# Altium PCB ALTERA256.PcbDoc (part 2 of 4)
Units mil, origin at the board's own origin, x right, y up, seen from the top; angles counter-clockwise.
Board outline 3078.86 x 1897.76 mil, 4 copper layers (TOP, L2_G, L3_P, BOTTOM), stack 34.7 mil thick; 112 components, 168 nets, 693 pads, 318 vias.
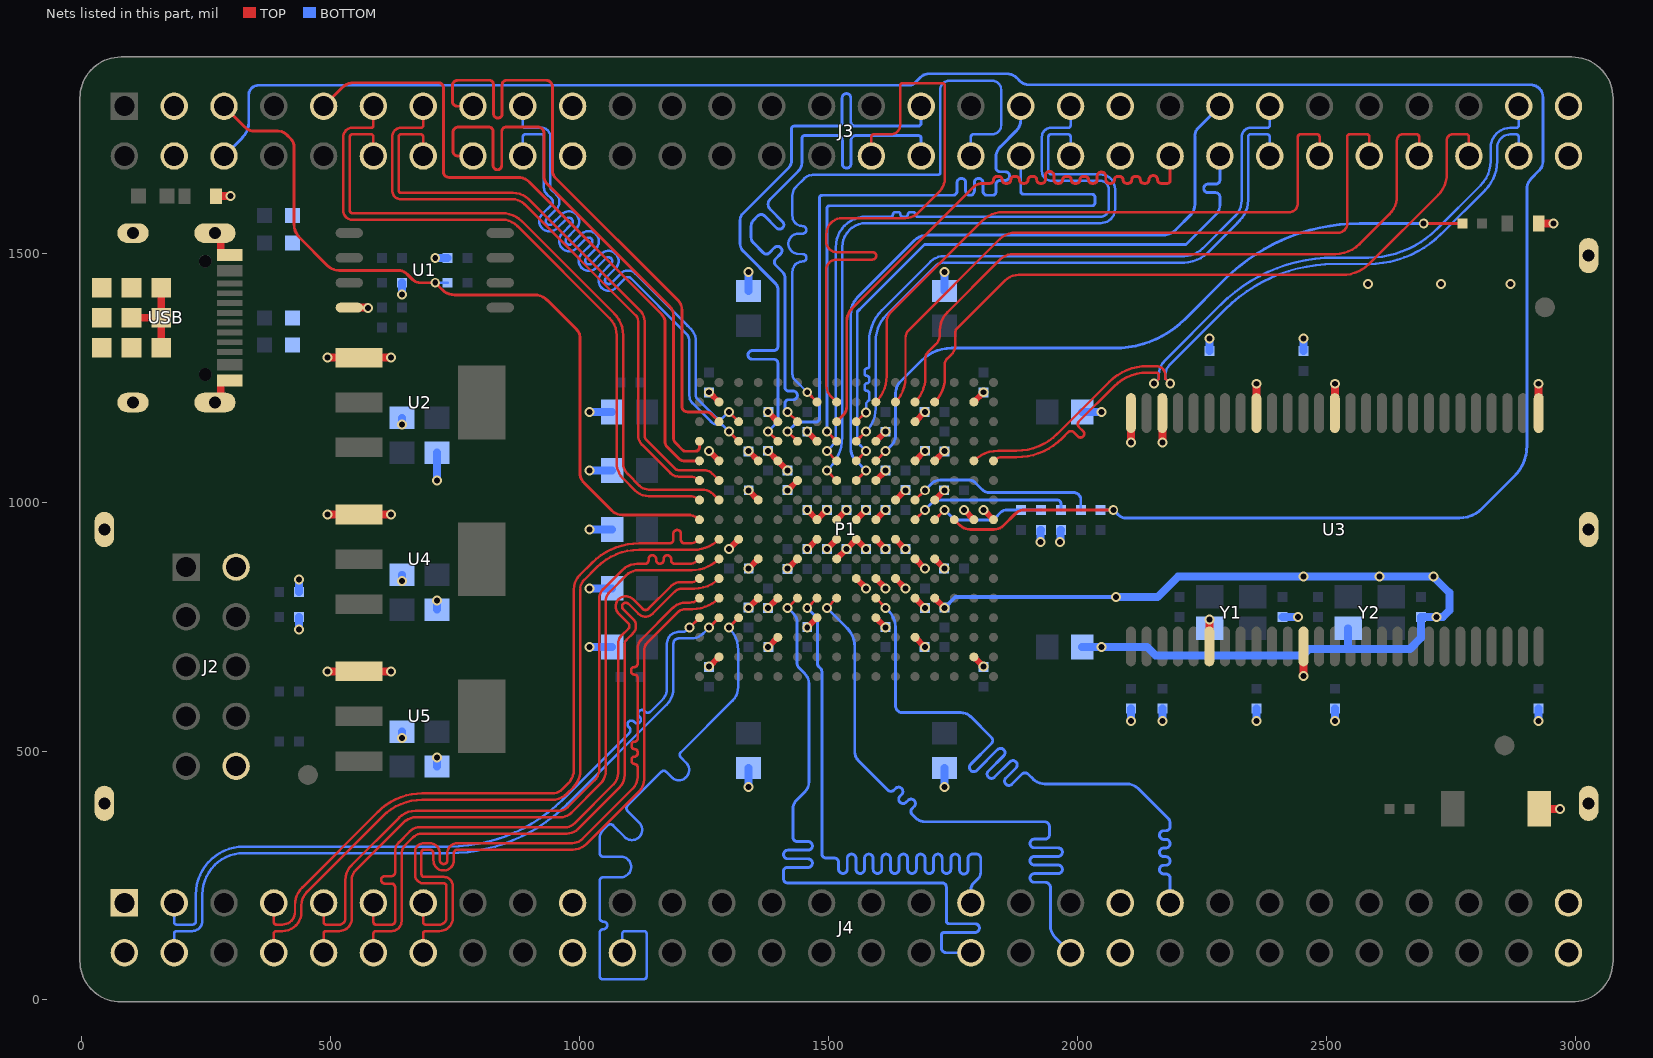
[diagram p4: the nets of this part, all layers, seen from the top]

## Via types
v1: diameter 20, hole 12, TOP to BOTTOM, 314 vias
v2: diameter 20, hole 12, TOP to BOTTOM, tented both sides, 4 vias

## Nets (pads, with @x,y where several pads share a name; then routed paths per layer and width w, separated by ;. In a path a pad name is that pad's centre, name@x,y a point inside that pad or via, vN(x,y) a via of type N, cw(c..) or ccw(c..) an arc to the next point about the centre after c; other vN are vias at no path point) (continued)
B7_T9P_B8: J3.36 P1.B7 | length 1327.8
  TOP w5.78: v1(1457,1220.46) P1.B7@1476.68,1200.78
  BOTTOM w5: v1(1457,1220.46) 1432.02,1245.44 cw(c1443.43,1256.84) 1427.3,1256.84 1427.3,1462.59 cw(c1447.8,1462.59) 1447.8,1483.09 ccw(c1447.8,1490.2) 1454.91,1490.2 1454.91,1490.98 ccw(c1447.8,1490.98) 1447.8,1498.09 1439.55,1498.09 cw(c1439.55,1518.59) 1439.55,1539.09 1447.8,1539.09 ccw(c1447.8,1546.2) 1454.91,1546.2 1454.91,1546.98 ccw(c1447.8,1546.98) 1447.8,1554.09 cw(c1447.8,1574.59) 1427.3,1574.59 1427.3,1615.78 cw(c1451.95,1615.78) 1434.52,1633.21 1451.1,1649.78 cw(c1468.51,1632.4) 1468.49,1657 1719.3,1657 ccw(c1719.3,1662) 1724.3,1662 1724.3,1828.17 cw(c1742.3,1828.17) 1742.3,1846.17 1828.3,1846.17 cw(c1828.3,1828.17) 1846.3,1828.17 1846.3,1756.38 cw(c1828.3,1756.38) 1828.3,1738.38 1790.73,1738.38 ccw(c1790.73,1733.38) 1785.73,1733.38 J3.36@1785.73,1694.88
B8_T11P_CLK4P_B8: J3.32 P1.B8 | length 1286.7
  TOP w5: P1.B8@1516.05,1200.78 1504.06,1212.77 cw(c1525.21,1233.92) 1495.3,1233.92 1495.3,1466.49 cw(c1515.8,1466.49) 1515.8,1486.99 1587.92,1486.99 ccw(c1587.92,1494.49) 1587.92,1501.99 1515.8,1501.99 cw(c1515.8,1522.49) 1495.3,1522.49 1495.3,1538 cw(c1527.3,1538) 1527.3,1570 1653.94,1570 ccw(c1653.93,1606.15) 1679.49,1580.59 1722.4,1623.48 ccw(c1696.15,1649.77) 1733.3,1649.77 1733.3,1836 ccw(c1728.3,1836) 1728.3,1841 1648.3,1841 ccw(c1648.3,1836) 1643.3,1836 1643.3,1756.38 cw(c1625.3,1756.38) 1625.3,1738.38 1590.73,1738.38 ccw(c1590.73,1733.38) 1585.73,1733.38 J3.32@1585.73,1694.88
B10_T16P_B7: J3.50 P1.B10 | length 1317.8
  TOP w5: P1.B10@1594.8,1200.78 ccw(c1542.89,1252.69) 1616.3,1252.69 1616.3,1361 cw(c1644.33,1361) 1624.51,1380.82 1808.29,1564.6 cw(c1850.3,1522.59) 1850.3,1582 2424.3,1582 ccw(c2424.3,1600) 2442.3,1600 2442.3,1733.38 cw(c2447.3,1733.38) 2447.3,1738.38 2480.73,1738.38 cw(c2480.73,1733.38) 2485.73,1733.38 J3.50@2485.73,1694.88
B11_T20P_B7: J3.52 P1.B11 | length 1384.5
  TOP w5: P1.B11@1634.17,1200.78 ccw(c1585.57,1249.38) 1654.3,1249.38 1654.3,1329.99 cw(c1675.09,1329.99) 1660.4,1344.7 1660.5,1344.8 ; 1660.49,1344.8 1843.53,1527.84 cw(c1875.3,1496.07) 1875.3,1541 2523.3,1541 ccw(c2523.3,1559) 2541.3,1559 2541.3,1733.38 cw(c2546.3,1733.38) 2546.3,1738.38 2580.73,1738.38 cw(c2580.73,1733.38) 2585.73,1733.38 J3.52@2585.73,1694.88
B12_T21P_B7: J3.54 P1.B12 | length 1410.1
  TOP w5: P1.B12@1673.54,1200.78 ccw(c1623.42,1250.9) 1694.3,1250.9 1694.3,1289 cw(c1711.2,1289) 1699.25,1300.95 1715.3,1317 ccw(c1695.99,1336.31) 1723.3,1336.31 1723.3,1345 cw(c1774,1345) 1738.15,1380.85 1836.3,1479 1843.98,1486.69 cw(c1871.29,1459.37) 1871.3,1498 2517.3,1498 ccw(c2517.31,1567.98) 2566.09,1517.8 2626.36,1578.07 ccw(c2588.22,1614.99) 2641.3,1615 2641.3,1727 cw(c2652.68,1727) 2652.68,1738.38 2680.73,1738.38 cw(c2680.73,1733.38) 2685.73,1733.38 J3.54@2685.73,1694.88
B13_T22P_B7: J3.56 P1.B13 | length 1440.1
  TOP w5: P1.B13@1712.91,1200.78 ccw(c1663.68,1250.01) 1733.3,1250.01 1733.3,1277 cw(c1747.79,1277.01) 1737.54,1287.25 1745.8,1295.5 ccw(c1725.28,1316.02) 1754.3,1316.02 1754.3,1340 cw(c1766.37,1339.99) 1757.84,1348.53 1853.99,1444.69 cw(c1881.3,1417.37) 1881.3,1456 2531.3,1456 ccw(c2531.31,1533.22) 2585.17,1477.88 2724.28,1616.99 ccw(c2680.98,1658.99) 2741.3,1659 2741.3,1726.38 cw(c2753.3,1726.38) 2753.3,1738.38 2780.73,1738.38 cw(c2780.73,1733.38) 2785.73,1733.38 J3.56@2785.73,1694.88
C2_IO_B1: J3.15 P1.C2 | length 1266
  TOP w5.78: J3.15@785.73,1794.88 754.42,1794.88 cw(c754.42,1805) 744.3,1805 744.3,1836 cw(c755.3,1836) 755.3,1847 818.3,1847 cw(c818.3,1838.33) 826.97,1838.33 826.97,1779.59 ccw(c835.64,1779.59) 844.31,1779.59 844.31,1838.33 cw(c852.98,1838.33) 852.98,1847 932.3,1847 cw(c932.3,1834) 945.3,1834 945.3,1665.49 ccw(c965.79,1665.49) 951.3,1651 1197.8,1404.5 cw(c1179.69,1386.39) 1205.3,1386.39 1205.3,1192 ccw(c1216.21,1192) 1216.21,1181.09 1252.91,1181.09 cw(c1252.91,1163.61) 1265.27,1175.97 P1.C2@1279.83,1161.41
C3_PLL3_CLKOUTN_B8: J3.17 P1.C3 | length 1210.9
  TOP w5.78: v1(1299.52,1181.09) P1.C3@1319.2,1161.41
  BOTTOM w5: J3.17@885.73,1794.88 885.73,1756.38 ccw(c890.73,1756.38) 890.73,1751.38 923.3,1751.38 cw(c923.3,1733.38) 941.3,1733.38 941.3,1631.46 ccw(c946.3,1631.46) 942.76,1627.93 953.3,1617.39 cw(c938.79,1602.9) 953.3,1588.4 934.1,1569.2 ccw(c939.39,1563.9) 934.1,1558.6 ; 934.12,1558.58 ccw(c939.42,1563.87) 944.72,1558.58 963.93,1577.78 cw(c978.42,1563.27) 992.93,1548.78 973.73,1529.57 ccw(c979.02,1524.27) 973.73,1518.97 ; 973.75,1518.95 ccw(c979.05,1524.24) 984.35,1518.95 1003.56,1538.15 cw(c1018.05,1523.64) 1032.56,1509.15 1013.36,1489.94 ccw(c1018.65,1484.64) 1013.36,1479.34 ; 1013.38,1479.32 ccw(c1018.68,1484.61) 1023.98,1479.32 1043.19,1498.52 cw(c1057.68,1484.01) 1072.19,1469.52 1052.99,1450.31 ccw(c1058.28,1445.01) 1052.99,1439.71 ; 1053.01,1439.69 ccw(c1058.31,1444.98) 1063.61,1439.69 1082.82,1458.89 cw(c1097.31,1444.38) 1111.8,1458.89 1216.49,1354.19 ; 1216.5,1354.2 1223.1,1347.6 cw(c1198.49,1322.98) 1233.3,1322.98 1233.3,1213.28 ccw(c1241.19,1213.28) 1235.62,1207.69 1272.64,1170.63 ccw(c1279.24,1177.24) 1279.25,1167.9 1284.26,1167.9 ccw(c1284.26,1172.9) 1287.79,1169.36 v1(1299.52,1181.09)
C6_IO_VREF_B8: J3.34 P1.C6 | length 1218.9
  TOP w5.78: v1(1417.63,1181.09) P1.C6@1437.31,1161.41
  BOTTOM w5.78: 1407.55,1562.73 1382.92,1587.36 cw(c1393.55,1597.99) 1382.92,1608.62 1439.23,1664.93 ccw(c1422.16,1682) 1446.3,1682 1446.3,1730.22 cw(c1452.08,1730.22) 1452.08,1736 1517.77,1736 cw(c1517.77,1726.33) 1527.44,1726.33 1527.44,1679.11 ccw(c1536.11,1679.11) 1544.78,1679.11 1544.78,1726.33 cw(c1554.45,1726.33) 1554.45,1736 1679.95,1736 cw(c1679.95,1730.22) 1685.73,1730.22 J3.34@1685.73,1694.88 ; 1407.56,1562.74 cw(c1401.42,1556.6) 1395.28,1550.46 1370.65,1575.09 ccw(c1364.52,1568.96) 1358.39,1575.09 1349.3,1566 ccw(c1361.37,1553.93) 1344.3,1553.93 1344.3,1531.36 ccw(c1359.66,1531.36) 1348.8,1520.5 1368.8,1500.5 ccw(c1374.93,1506.63) 1381.06,1500.5 1391.43,1510.87 cw(c1397.57,1504.73) 1403.71,1498.59 1393.33,1488.23 ccw(c1399.46,1482.1) 1393.33,1475.97 1407.3,1462 cw(c1395.23,1449.93) 1412.3,1449.93 1412.3,1230.32 ccw(c1419.8,1230.32) 1419.8,1222.82 1428.63,1222.82 cw(c1428.63,1214.15) 1428.63,1205.48 1419.8,1205.48 ccw(c1419.8,1197.98) 1412.3,1197.98 1412.3,1186.42 v1(1417.63,1181.09)
C8_IO_B8: J3.44 P1.C8 | length 1227.8
  TOP w5.78: P1.C8@1516.05,1161.41 1529.47,1174.83 ccw(c1512.98,1191.32) 1536.3,1191.32 1536.3,1362.61 cw(c1573.43,1362.62) 1547.17,1388.87 1790.68,1632.38 cw(c1809.08,1613.98) 1809.08,1640 1824.1,1640 ccw(c1824.1,1647) 1831.1,1647 cw(c1838.1,1647) 1838.1,1654 1841.44,1654 cw(c1841.44,1647) 1848.44,1647 ccw(c1855.44,1647) 1855.44,1640 1858.78,1640 ccw(c1858.78,1647) 1865.78,1647 cw(c1872.78,1647) 1872.78,1654 1876.12,1654 cw(c1876.12,1647) 1883.12,1647 ccw(c1890.12,1647) 1890.12,1640 1893.46,1640 ccw(c1893.46,1647) 1900.46,1647 cw(c1907.46,1647) 1907.46,1654 1910.8,1654 cw(c1910.8,1647) 1917.8,1647 ccw(c1924.8,1647) 1924.8,1640 1928.14,1640 ccw(c1928.14,1647) 1935.14,1647 1935.14,1655.34 cw(c1943.81,1655.34) 1952.48,1655.34 1952.48,1647 ccw(c1959.48,1647) 1959.48,1640 1962.82,1640 ccw(c1962.82,1647) 1969.82,1647 cw(c1976.82,1647) 1976.82,1654 1980.16,1654 cw(c1980.16,1647) 1987.16,1647 ccw(c1994.16,1647) 1994.16,1640 1997.5,1640 ccw(c1997.5,1647) 2004.5,1647 cw(c2011.5,1647) 2011.5,1654 2014.84,1654 cw(c2014.84,1647) 2021.84,1647 ccw(c2028.84,1647) 2028.84,1640 2032.18,1640 ccw(c2032.18,1647) 2039.18,1647 2039.18,1654.02 cw(c2047.84,1654.02) 2047.84,1662.68 cw(c2047.84,1654) 2056.52,1654 2056.52,1647 ccw(c2063.52,1647) 2063.52,1640 2066.86,1640 ccw(c2066.86,1647) 2073.86,1647 cw(c2080.86,1647) 2080.86,1654 2084.2,1654 cw(c2084.2,1647) 2091.2,1647 ccw(c2098.2,1647) 2098.2,1640 2101.54,1640 ccw(c2101.54,1647) 2108.54,1647 cw(c2115.54,1647) 2115.54,1654 2118.88,1654 cw(c2118.88,1647) 2125.88,1647 ccw(c2132.88,1647) 2132.88,1640 2136.22,1640 ccw(c2136.22,1647) 2143.22,1647 cw(c2151.88,1647) 2151.88,1655.66 ; 2151.9,1655.66 cw(c2151.9,1647) 2160.56,1647 ccw(c2167.56,1647) 2167.56,1640 2179.95,1640 ccw(c2179.95,1645.78) 2185.73,1645.78 J3.44@2185.73,1694.88
C9_T15N_B7: J3.47 P1.C9 | length 1316.6
  TOP w5.78: P1.C9@1555.43,1161.41 1555.92,1161.41 1574.51,1180 v1(1575,1180)
  BOTTOM w5: v1(1575,1180) 1575,1198.28 1581.3,1204.58 1581.3,1218.8 ccw(c1576.8,1218.8) 1576.8,1223.3 cw(c1576.8,1227.8) 1572.3,1227.8 1572.3,1233.8 cw(c1576.8,1233.8) 1576.8,1238.3 ccw(c1576.8,1242.8) 1581.3,1242.8 1581.3,1248.8 ccw(c1576.8,1248.8) 1576.8,1253.3 cw(c1576.8,1257.8) 1572.3,1257.8 1572.3,1263.8 cw(c1576.8,1263.8) 1576.8,1268.3 ccw(c1576.8,1272.8) 1581.3,1272.8 1581.3,1323 cw(c1669.15,1323.01) 1607.03,1385.13 1704.48,1482.58 cw(c1732.05,1455.01) 1732.05,1494 2213.7,1494 ccw(c2213.7,1547.6) 2251.6,1509.7 2316.15,1574.25 ccw(c2284.4,1606) 2329.3,1606 2329.3,1733.38 cw(c2347.3,1733.38) 2347.3,1751.38 2380.73,1751.38 ccw(c2380.73,1756.38) 2385.73,1756.38 J3.47@2385.73,1794.88
CONF_DONE: J3.6 P1.H14 R13.1 | length 4767.5
  TOP w5.78: P1.H14@1752.28,964.56 1762.94,953.9 ccw(c1786.65,977.61) 1764.26,952.65 ccw(c1784.23,974.87) 1784.21,945 1831.99,945 ccw(c1831.99,972.31) 1851.3,953 1874.8,976.5 cw(c1893.49,957.81) 1893.49,984.24 v1(2071.54,984.24)
  BOTTOM w5.78: J3.6@285.73,1694.88 322.57,1731.72 ccw(c291.84,1762.45) 335.3,1762.45 335.3,1817 cw(c355.3,1817) 355.3,1837 1661.94,1837 ccw(c1661.94,1852.36) 1672.8,1841.5 1684.3,1853 cw(c1701.2,1836.1) 1701.2,1860 1858.3,1860 cw(c1858.3,1833.44) 1877.08,1852.22 1884.3,1845 ccw(c1901.2,1861.9) 1901.2,1838 2909.3,1838 cw(c2909.3,1813) 2934.3,1813 2934.3,1683.61 cw(c2908.69,1683.61) 2926.8,1665.5 2910.8,1649.5 ccw(c2931.32,1628.98) 2902.3,1628.98 2902.3,1113.52 cw(c2814.13,1113.52) 2876.48,1051.18 2812.15,986.85 cw(c2766.64,1032.36) 2766.64,968 2096.82,968 cw(c2096.83,989.84) 2081.38,974.4 v1(2071.54,984.24) R13.1@2046.3,984.24
D1_IO_B1: J3.16 P1.D1 | length 1236.2
  TOP w5.78: J3.16@785.73,1694.88 755.42,1694.88 cw(c755.42,1705) 745.3,1705 745.3,1742 cw(c756.3,1742) 756.3,1753 817.47,1753 cw(c817.47,1744.33) 826.14,1744.33 826.14,1675.93 ccw(c834.81,1675.93) 843.48,1675.93 843.48,1744.33 cw(c852.15,1744.33) 852.15,1753 916.3,1753 cw(c916.3,1741) 928.3,1741 928.3,1654.9 ccw(c952.2,1654.9) 935.3,1638 1180.8,1392.5 cw(c1162.69,1374.39) 1188.3,1374.39 1188.3,1128.66 ccw(c1201.96,1128.66) 1192.3,1119 1207.6,1103.7 ccw(c1211.7,1107.79) 1211.7,1102 1232.68,1102 ccw(c1232.68,1109.78) 1240.46,1109.78 P1.D1@1240.46,1122.04
D3_PLL3_CLKOUTP_B8: J3.18 P1.D3 | length 1210.9
  TOP w5.78: v1(1299.52,1141.72) P1.D3@1319.2,1122.04
  BOTTOM w5: J3.18@885.73,1694.88 885.73,1733.38 cw(c890.73,1733.38) 890.73,1738.38 923.3,1738.38 cw(c923.3,1733.38) 928.3,1733.38 928.3,1631.46 ccw(c946.31,1631.46) 933.56,1618.74 944.1,1608.19 cw(c938.79,1602.9) 944.1,1597.6 924.9,1578.4 ccw(c939.39,1563.9) 924.9,1549.4 ; 924.92,1549.38 ccw(c939.42,1563.87) 953.92,1549.38 973.12,1568.58 cw(c978.42,1563.27) 983.73,1557.97 964.53,1538.77 ccw(c979.02,1524.27) 964.53,1509.77 ; 964.55,1509.75 ccw(c979.05,1524.24) 993.55,1509.75 1012.75,1528.95 cw(c1018.05,1523.64) 1023.36,1518.34 1004.16,1499.14 ccw(c1018.65,1484.64) 1004.16,1470.14 ; 1004.18,1470.12 ccw(c1018.68,1484.61) 1033.18,1470.12 1052.38,1489.32 cw(c1057.68,1484.01) 1062.99,1478.71 1043.79,1459.51 ccw(c1058.28,1445.01) 1043.79,1430.51 ; 1043.81,1430.49 ccw(c1058.31,1444.98) 1072.81,1430.49 1092.01,1449.69 cw(c1097.31,1444.38) 1102.61,1449.69 1213.9,1338.4 cw(c1198.49,1322.97) 1220.3,1322.98 1220.3,1213.28 ccw(c1241.2,1213.27) 1226.42,1198.49 1263.45,1161.43 ccw(c1279.23,1177.24) 1279.27,1154.9 1284.27,1154.9 cw(c1284.27,1149.9) 1287.8,1153.44 v1(1299.52,1141.72)
D5_IO_B8: J3.33 P1.D5 | length 1235.9
  TOP w5.78: v1(1378.26,1141.72) P1.D5@1397.94,1122.04
  BOTTOM w5.78: v1(1378.26,1141.72) 1391.92,1155.38 1392.47,1155.94 ccw(c1378.41,1170.01) 1398.3,1170 1398.3,1278.07 ccw(c1389.63,1278.07) 1389.63,1286.74 1346.62,1286.74 cw(c1346.62,1295.41) 1346.62,1304.08 1389.63,1304.08 ccw(c1389.63,1312.75) 1398.3,1312.75 1398.3,1426.22 ccw(c1379.52,1426.22) 1392.8,1439.5 1329.8,1502.5 1328.66,1503.63 cw(c1344.03,1518.99) 1322.3,1519 1322.3,1566.22 cw(c1341.08,1566.22) 1327.8,1579.5 1419.3,1671 ccw(c1404.81,1685.49) 1425.3,1685.49 1425.3,1749.22 cw(c1431.08,1749.22) 1431.08,1755 1518.42,1755 ccw(c1518.42,1763.67) 1527.09,1763.67 1527.09,1811.49 cw(c1535.76,1811.49) 1544.43,1811.49 1544.43,1763.67 ccw(c1553.1,1763.67) 1553.1,1755 1679.95,1755 ccw(c1679.95,1760.78) 1685.57,1759.44 ccw(c1679.86,1760.8) 1685.73,1760.8 J3.33@1685.73,1794.88
D6_IO_B8: J3.37 P1.D6 | length 1244.3
  TOP w5.78: v1(1417.63,1141.72) P1.D6@1437.31,1122.04
  BOTTOM w5.78: v1(1417.63,1141.72) 1435.14,1159.28 cw(c1439.25,1155.23) 1439.25,1161 1475.52,1161 ccw(c1475.52,1166.78) 1481.3,1166.78 1481.3,1610.22 cw(c1487.08,1610.22) 1487.08,1616 1749.15,1616 ccw(c1749.15,1624.67) 1757.82,1624.67 1757.82,1641.33 cw(c1766.49,1641.33) 1775.16,1641.33 1775.16,1624.67 ccw(c1783.83,1624.67) 1792.5,1624.67 1792.5,1641.33 cw(c1801.17,1641.33) 1809.84,1641.33 1809.84,1624.67 ccw(c1818.51,1624.67) 1818.51,1616 1829.29,1616 ccw(c1829.29,1622.51) 1835.8,1622.51 1835.8,1637.24 cw(c1844.47,1637.24) 1844.47,1645.91 1854.63,1645.91 ccw(c1854.63,1654.58) 1854.63,1663.25 1844.47,1663.25 cw(c1844.47,1671.92) 1835.8,1671.92 1835.8,1691.77 cw(c1866.53,1691.77) 1844.8,1713.5 1876.8,1745.5 ccw(c1855.24,1767.06) 1885.73,1767.06 J3.37@1885.73,1794.88
D8_IO_B8: J3.38 P1.D8 | length 1258.4
  TOP w5.78: v1(1496.37,1141.72) P1.D8@1516.05,1122.04
  BOTTOM w5.78: v1(1496.37,1141.72) 1496.37,1589.22 cw(c1502.15,1589.22) 1502.15,1595 2028.93,1595 ccw(c2028.93,1600.78) 2034.71,1600.78 2034.71,1612.22 ccw(c2028.93,1612.22) 2028.93,1618 1891.51,1618 cw(c1891.51,1623.78) 1885.73,1623.78 J3.38@1885.73,1694.88
D9_T15P_B7: J3.48 P1.D9 | length 1317
  TOP w5.78: P1.D9@1555.43,1122.04 v1(1575.11,1141.72)
  BOTTOM w5: v1(1575.11,1141.72) ccw(c1528.78,1188.05) 1594.3,1188.05 1594.3,1323 cw(c1669.14,1323) 1616.23,1375.93 1626.79,1386.5 ; 1626.8,1386.5 1713.68,1473.38 cw(c1732.06,1455.02) 1732.05,1481 2213.71,1481 ccw(c2213.7,1547.6) 2260.79,1500.5 2320.79,1560.5 ; 2320.8,1560.5 2325.35,1565.05 ccw(c2284.39,1605.99) 2342.3,1606.01 2342.3,1733.38 cw(c2347.3,1733.38) 2347.3,1738.38 2380.73,1738.38 cw(c2380.73,1733.38) 2385.73,1733.38 J3.48@2385.73,1694.88
DCLK: J3.5 P1.H1 R7.2 | length 1585.1
  TOP w5.78: J3.5@285.73,1794.88 327.95,1752.66 ccw(c346.44,1771.15) 346.44,1745 393.69,1745 cw(c393.69,1719.39) 411.8,1737.5 419.3,1730 cw(c402.4,1713.1) 426.3,1713.1 426.3,1557.56 ccw(c463.86,1557.56) 437.3,1531 493.8,1474.5 ccw(c516.74,1497.44) 516.74,1465 635.69,1465 cw(c635.69,1439.39) 653.8,1457.5 664.8,1446.5 ccw(c679.55,1461.25) 679.55,1440.39 v1(709.95,1440.39) 724.32,1426.02 ccw(c748.51,1450.21) 748.51,1416 909.45,1416 cw(c909.45,1380.15) 934.8,1405.5 994.3,1346 cw(c979.81,1331.51) 1000.3,1331.51 1000.3,1060 ccw(c1031.68,1060) 1009.49,1037.81 1064.3,983 ccw(c1086.03,1004.73) 1086.03,974 1217.67,974 cw(c1217.67,941.77) P1.H1@1240.46,964.56
  BOTTOM w5.78: v1(709.95,1440.39) R7.2@734.95,1440.39
E1_CLK1_B1: J3.9 P1.E1 | length 1335.7
  TOP w5.78: J3.9@485.73,1794.88 523.35,1832.53 cw(c546.15,1809.81) 546.16,1842 716.6,1842 cw(c716.6,1832.3) 726.3,1832.3 726.3,1663 ccw(c737.3,1663) 737.3,1652 875.86,1652 cw(c875.86,1619.56) 898.8,1642.5 1165,1376.3 cw(c1149.79,1361.09) 1171.3,1361.09 1171.3,1120.66 ccw(c1184.96,1120.66) 1175.3,1111 1199.8,1086.5 ccw(c1209.05,1095.75) 1209.05,1082.67 P1.E1@1240.46,1082.67
E8_T10N_B8: J3.39 P1.E8 | length 1428
  TOP w5.78: v1(1496.37,1102.35) P1.E8@1516.05,1082.67
  BOTTOM w5: v1(1496.37,1102.35) 1505.42,1111.4 ccw(c1483.98,1132.84) 1514.3,1132.84 1514.3,1512 cw(c1575.3,1512) 1575.3,1573 1624.66,1573 ccw(c1624.66,1577.5) 1629.16,1577.5 cw(c1633.66,1577.5) 1633.66,1582 1639.66,1582 cw(c1639.66,1577.5) 1644.16,1577.5 ccw(c1648.66,1577.5) 1648.66,1573 1654.66,1573 ccw(c1654.66,1577.5) 1659.16,1577.5 cw(c1663.66,1577.5) 1663.66,1582 1669.66,1582 cw(c1669.66,1577.5) 1674.16,1577.5 ccw(c1678.66,1577.5) 1678.66,1573 2046.3,1573 ccw(c2046.3,1589) 2062.3,1589 2062.3,1628.05 ccw(c2045.35,1628.05) 2045.35,1645 1947.56,1645 cw(c1947.56,1664.26) 1928.3,1664.26 1928.3,1733.38 cw(c1946.3,1733.38) 1946.3,1751.38 1980.73,1751.38 ccw(c1980.73,1756.38) 1985.73,1756.38 J3.39@1985.73,1794.88
E9_IO_B7: J3.46 P1.E9 | length 1285.8
  TOP w5.78: P1.E9@1555.43,1082.67 v1(1575.11,1102.35)
  BOTTOM w5.78: v1(1575.11,1102.35) 1563.74,1113.72 cw(c1574.68,1124.67) 1563.18,1114.31 1557.31,1120.18 1557.31,1382.01 1568.72,1393.42 1681.29,1506 1692.29,1517 2217.29,1517 2277.8,1577.51 ccw(c2258.67,1596.65) 2285.73,1596.65 2285.73,1612.54 ccw(c2277.06,1612.54) 2277.06,1621.21 2261.97,1621.21 cw(c2261.97,1629.88) 2261.97,1638.55 2277.06,1638.55 ccw(c2277.06,1647.22) 2285.73,1647.22 J3.46@2285.73,1694.88
E10_LED0_B7: P1.E10 R2.2 | length 1407.8
  TOP w5.78: P1.E10@1594.8,1082.67 v1(1614.48,1102.35) ; v1(2695.02,1559.28) R2.2@2772.42,1559.28
  BOTTOM w5.78: v1(1614.48,1102.35) 1625.56,1113.43 ccw(c1600.33,1138.65) 1626.41,1114.31 ccw(c1604.97,1134.32) 1634.3,1134.32 1634.3,1218 cw(c1668.1,1218) 1644.2,1241.9 1686.32,1284.02 cw(c1746.62,1223.73) 1746.62,1309 2073.7,1309 ccw(c2073.7,1510.82) 2216.41,1368.11 2295.23,1446.93 cw(c2566.47,1175.69) 2566.47,1559.28 v1(2695.02,1559.28)
E15_CLK_2P_B6: J3.58 P1.E15 | length 1473.8
  TOP w5: P1.E15@1791.65,1082.67 cw(c1840.73,1033.59) 1840.73,1103 1876.99,1103 ccw(c1877,1219.66) 1959.47,1137.15 2063.87,1241.53 cw(c2139.87,1165.5) 2139.88,1273 2157.66,1273 cw(c2157.66,1254.35) 2176.31,1254.35 2176.31,1247.64 v1(2185.95,1238)
  BOTTOM w5: v1(2185.95,1238) 2176.31,1247.64 2176.31,1255.78 cw(c2203.45,1255.77) 2184.27,1274.97 2296.19,1386.89 cw(c2516.14,1166.95) 2516.14,1478 2583.7,1478 ccw(c2583.7,1685.61) 2730.5,1538.8 2818.71,1627.01 ccw(c2761.74,1683.97) 2842.3,1683.98 2842.3,1711.5 cw(c2869.18,1711.5) 2869.18,1738.38 2880.73,1738.38 cw(c2880.73,1733.38) 2885.73,1733.38 J3.58@2885.73,1694.88
E16_CLK_2N_B6: J3.57 P1.E16 | length 1472.6
  TOP w5: P1.E16@1831.02,1082.67 cw(c1848.72,1064.97) 1848.72,1090 1876.98,1090 ccw(c1877.01,1219.66) 1968.67,1127.95 1981.1,1140.37 cw(c1986.4,1135.06) 1991.7,1140.37 2000.38,1131.69 ccw(c2005.68,1137) 2010.99,1142.3 2002.31,1150.98 cw(c2007.62,1156.28) 2002.31,1161.58 2073.07,1232.33 cw(c2139.88,1165.51) 2139.88,1260 2157.66,1260 cw(c2157.66,1254.35) 2163.31,1254.35 2163.31,1247.65 v1(2153.66,1238)
  BOTTOM w5: v1(2153.66,1238) 2163.31,1247.65 2163.31,1255.79 cw(c2203.46,1255.78) 2175.07,1284.17 2286.99,1396.09 cw(c2516.13,1166.95) 2516.14,1491 2583.7,1491 ccw(c2583.69,1685.61) 2721.3,1548 2809.51,1636.21 ccw(c2761.73,1683.97) 2829.29,1683.98 ; 2829.3,1683.97 2829.3,1711.5 cw(c2869.18,1711.5) 2869.18,1751.38 2880.73,1751.38 ccw(c2880.73,1756.38) 2885.73,1756.38 J3.57@2885.73,1794.88
F1_L5N_B1: J3.13 P1.F1 | length 1222.1
  TOP w5: J3.13@685.73,1794.88 685.73,1756.38 cw(c680.73,1756.38) 680.73,1751.38 641.3,1751.38 ccw(c641.3,1733.38) 623.3,1733.38 623.3,1626 ccw(c641.3,1626) 641.3,1608 865.53,1608 cw(c865.52,1574.72) 889.06,1598.24 1112.63,1374.67 cw(c1101.41,1363.42) 1117.3,1363.43 1117.3,1134.11 ccw(c1144.02,1134.1) 1125.12,1115.21 1182.21,1058.07 ccw(c1199.27,1075.13) 1199.28,1051 1222.3,1051 cw(c1222.29,1025.75) 1240.15,1043.6 P1.F1@1240.46,1043.3
F2_L5P_B1: J3.14 P1.F2 | length 1226
  TOP w5: J3.14@685.73,1694.88 685.73,1733.38 ccw(c680.73,1733.38) 680.73,1738.38 641.3,1738.38 ccw(c641.3,1733.38) 636.3,1733.38 636.3,1626 ccw(c641.3,1626) 641.3,1621 865.54,1621 cw(c865.53,1574.72) 898.26,1607.44 1121.83,1383.87 cw(c1101.4,1363.43) 1130.3,1363.43 1130.3,1134.11 ccw(c1144.01,1134.11) 1134.32,1124.41 1191.41,1067.26 ccw(c1199.28,1075.13) 1199.27,1064 1249.12,1064 cw(c1249.12,1039.83) 1266.21,1056.92 P1.F2@1279.83,1043.3
F8_T10P_B8: J3.40 P1.F8 | length 1429.3
  TOP w5.78: v1(1496.37,1062.98) P1.F8@1516.05,1043.3
  BOTTOM w5: v1(1496.37,1062.98) 1501.38,1067.99 ccw(c1438.79,1130.57) 1527.3,1130.57 1527.3,1512 cw(c1575.3,1512) 1575.3,1560 2046.3,1560 ccw(c2046.3,1589) 2075.3,1589 2075.3,1628.05 ccw(c2045.35,1628.05) 2045.35,1658 1947.56,1658 cw(c1947.56,1664.26) 1941.3,1664.26 1941.3,1733.38 cw(c1946.3,1733.38) 1946.3,1738.38 1980.73,1738.38 cw(c1980.73,1733.38) 1985.73,1733.38 J3.40@1985.73,1694.88
F9_IO_B7: J3.45 P1.F9 | length 1365.6
  TOP w5.78: P1.F9@1555.43,1043.3 v1(1575.11,1062.98)
  BOTTOM w5.78: v1(1575.11,1062.98) 1553.69,1084.4 cw(c1576.36,1107.07) 1544.3,1107.07 1544.3,1376.42 cw(c1595.47,1376.42) 1559.48,1412.8 1671.74,1525.06 cw(c1698.15,1498.65) 1698.15,1536 2170.74,1536 ccw(c2170.74,1573.56) 2197.3,1547 2227.3,1577 ccw(c2207.99,1596.31) 2235.3,1596.31 2235.3,1734.71 cw(c2258.81,1734.71) 2242.19,1751.34 J3.45@2285.73,1794.88
G1_L6N_VREF_B1: J3.11 P1.G1 | length 1383.2
  TOP w5: J3.11@585.73,1794.88 585.73,1756.38 cw(c580.73,1756.38) 580.73,1751.38 543.3,1751.38 ccw(c543.3,1733.38) 525.3,1733.38 525.3,1585 ccw(c543.3,1585) 543.3,1567 844.3,1567 cw(c844.3,1523.57) 875.01,1554.28 1060.17,1369.12 cw(c1026.04,1335) 1074.3,1335 1074.3,1078.61 ccw(c1119.2,1078.61) 1087.45,1046.86 1111.01,1023.31 ccw(c1138.31,1050.6) 1138.3,1012 1220.98,1012 cw(c1220.98,984.45) P1.G1@1240.46,1003.93
G2_L6P_B1: J3.12 P1.G2 | length 1386.9
  TOP w5: J3.12@585.73,1694.88 585.73,1733.38 ccw(c580.73,1733.38) 580.73,1738.38 543.3,1738.38 ccw(c543.3,1733.38) 538.3,1733.38 538.3,1585 ccw(c543.3,1585) 543.3,1580 844.3,1580 cw(c844.31,1523.56) 883.58,1564.1 1069.37,1378.31 cw(c1026.08,1335.02) 1087.3,1335.02 1087.3,1078.61 ccw(c1119.2,1078.62) 1096.65,1056.06 1120.2,1032.51 ccw(c1138.32,1050.59) 1138.3,1025 1245.65,1025 cw(c1245.65,993.35) 1268.03,1015.73 P1.G2@1279.83,1003.93
GND: C1.2 C2.2 C3.2 C4.2 C5.2 C6.2 C7.2 C8.2 C9.2 C10.2 C11.2 C12.2 C13.2 C14.2 C15.2 C16.2 C17.2 C18.2 C19.2 C20.2 C21.2 C22.2 C23.2 C24.2 C25.2 C26.2 C27.2 C28.2 C29.2 C30.2 C31.2 C32.2 C33.2 C34.2 C35.2 C36.2 C37.2 C38.2 C39.2 C40.2 C41.2 C42.2 C43.2 C44.2 C45.2 C46.2 C47.2 C48.2 C49.2 C50.2 C51.2 C52.2 C53.2 C54.2 C55.2 C56.2 C57.2 C58.2 C59.2 C60.2 C61.2 C62.2 C63.2 C64.2 C65.2 C66.2 C67.2 C68.2 C69.2 C70.2 C71.2 D1.2 D2.2 J2.2 J2.10 J3.3 J3.4 J3.19 J3.20 J3.41 J3.42 J3.59 J3.60 J4.1 J4.2 J4.19 J4.20 J4.41 J4.42 J4.59 J4.60 P1.B2 P1.B15 P1.C5 P1.C12 P1.D7 P1.D10 P1.E2 P1.E4 P1.E5 P1.E12 P1.E13 P1.F6 P1.F10 P1.G4 P1.G11 P1.G13 P1.H7 P1.H8 P1.H9 P1.H10 P1.H15 P1.H16 P1.J3 P1.J7 P1.J8 P1.J9 P1.J10 P1.J11 P1.K4 P1.K6 P1.K8 P1.K12 P1.K13 P1.L9 P1.L10 P1.L11 P1.M4 P1.M5 P1.M12 P1.M13 P1.N7 P1.N10 P1.P5 P1.P12 P1.R2 P1.R15 R11.1 R12.1 R16.2 R20.2 R21.2 S1.2 T1.1 T2.1 T3.1 T4.1 T5.1 U1.4 U2.1 U3.6 U3.12 U3.28 U3.41 U3.46 U3.52 U3.54 U4.1 U5.1 USB.1 USB.12 USB.SH1 USB.SH2 USB.SH3 USB.SH4 Y1.2 Y2.2 | length 5435
  TOP w12: v1(1260.15,669.28) P1.R2@1279.83,688.96 ; v1(1260.15,1102.35) P1.E2@1279.83,1082.67 ; v1(1260.15,1220.46) P1.B2@1279.83,1200.78 ; v1(1299.52,905.5) P1.J3@1319.2,925.18 ; v1(1338.89,787.39) P1.M4@1358.57,807.07 ; v1(1338.89,866.13) P1.K4@1358.57,885.81 ; v1(1338.89,1023.61) P1.G4@1358.57,1003.93 ; v1(1338.89,1102.35) P1.E4@1358.57,1082.67 ; v1(1378.26,708.65) P1.P5@1397.94,728.33 ; v1(1378.26,787.39) P1.M5@1397.94,807.07 ; v1(1378.26,1102.35) P1.E5@1397.94,1082.67 v1(1417.62,1062.99) ; v1(1378.26,1181.09) P1.C5@1397.94,1161.41 ; v1(1417.63,866.13) P1.K6@1437.31,885.81 ; v1(1417.63,1023.62) P1.F6@1437.31,1043.3 ; v1(1457,748.02) P1.N7@1476.68,767.7 ; v1(1457,905.5) P1.J7@1476.68,925.18 ; v1(1457,984.24) P1.H7@1476.68,964.56 v1(1496.36,984.24) ; v1(1457,1141.72) P1.D7@1476.68,1122.04 ; v1(1496.37,905.5) P1.J8@1516.05,925.18 ; P1.K8@1516.05,885.81 v1(1535.75,905.5) P1.J9@1555.43,925.18 v1(1575.11,905.5) ; P1.H8@1516.05,964.56 v1(1535.73,984.24) ; P1.L9@1555.43,846.44 v1(1575.11,826.76) ; P1.H9@1555.43,964.56 v1(1575.11,984.24) ; P1.N10@1594.8,767.7 v1(1614.48,748.02) ; P1.L10@1594.8,846.44 v1(1614.48,826.76) ; P1.J10@1594.8,925.18 v1(1614.48,905.5) ; P1.H10@1594.8,964.56 v1(1614.48,984.24) ; P1.F10@1594.8,1043.3 v1(1614.48,1062.98) ; P1.D10@1594.8,1122.04 v1(1614.48,1141.72) ; P1.L11@1634.17,846.44 v1(1653.85,826.76) ; P1.J11@1634.17,925.18 v1(1653.85,905.5) ; P1.G11@1634.17,1003.93 v1(1653.85,1023.61) ; P1.P12@1673.54,728.33 v1(1693.22,708.65) ; P1.M12@1673.54,807.07 v1(1693.22,787.39) ; P1.K12@1673.54,885.81 v1(1693.22,866.13) ; P1.E12@1673.54,1082.67 v1(1693.22,1102.35) ; P1.C12@1673.54,1161.41 v1(1693.22,1181.09) ; P1.M13@1712.91,807.07 v1(1732.59,787.39) ; P1.K13@1712.91,885.81 v1(1732.59,866.13) ; P1.G13@1712.91,1003.93 v1(1732.59,1023.61) ; P1.E13@1712.91,1082.67 v1(1732.59,1102.35) ; v1(1771.96,984.24) P1.H15@1791.65,964.56 ; P1.R15@1791.65,688.96 v1(1811.33,669.28) ; P1.B15@1791.65,1200.78 v1(1811.33,1220.46) ; v1(1811.34,984.24) P1.H16@1831.02,964.56
  TOP w15: USB.SH2@100,1370 USB.SH2@160,1370 ; USB.SH2@160,1315 USB.SH2@160,1370 ; USB.SH2@160,1430 USB.SH2@160,1370 ; USB.SH1@275,1540 278.86,1536.14 278.86,1500.3 283.17,1495.98 USB.1@296.95,1495.98 ; USB.SH3@280,1200 278.86,1201.14 278.86,1239.7 283.17,1244.02 USB.12@296.95,1244.02
  TOP w16: D1.2@269.63,1614.28 v1(298.98,1614.28) ; v1(493.21,660.02) U5.1@557.27,660.02 v1(621.33,660.02) ; v1(493.21,975.02) U4.1@557.27,975.02 v1(621.33,975.02) ; v1(493.21,1290.02) U2.1@557.27,1290.02 v1(621.33,1290.02) ; U1.4@537.38,1390.39 537.57,1390.19 574.8,1390.19 v1(575,1390) ; v1(2106.97,1119.54) U3.54@2106.97,1178.54 ; v1(2169.96,1119.54) U3.52@2169.96,1178.54 ; U3.6@2264.45,710.04 v1(2264.45,764.04) ; U3.46@2358.94,1178.54 v1(2358.94,1237.54) ; v1(2453.43,651.04) U3.12@2453.43,710.04 ; U3.41@2516.42,1178.54 v1(2516.42,1237.54) ; U3.28@2925.87,1178.54 v1(2925.87,1237.54) ; D2.2@2925.87,1559.28 v1(2955.22,1559.28) ; S1.2@2926.89,383.99 v1(2968.39,383.99)
  BOTTOM w7.5: v1(1732.59,787.39) 1754.27,809.07 v1(2077.3,809.07)
  BOTTOM w16: v1(436.7,744.45) C50.2@436.7,769.45 ; R16.2@436.7,819.45 v1(436.7,844.45) ; v1(643,1416.39) C4.2@643,1440.39 ; v1(643.3,525.99) C67.2@643.3,538.99 ; v1(643.3,840.99) C47.2@643.3,853.99 ; v1(643.3,1155.99) C18.2@643.3,1168.99 ; v1(709.95,1490.39) C3.2@734.95,1490.39 ; C66.2@713.3,468.99 v1(713.3,486.99) ; C46.2@713.3,783.99 v1(713.3,801.99) ; v1(713.3,1043) C17.2@713.3,1098.99 ; v1(1019.3,708.65) C58.2@1065.3,708.65 ; v1(1019.3,826.76) C45.2@1065.3,826.76 ; v1(1019.3,944.86) C35.2@1065.3,944.86 ; v1(1019.3,1062.98) C25.2@1065.3,1062.98 ; v1(1019.3,1181.09) C14.2@1065.3,1181.09 ; v1(1338.89,427.46) C69.2@1338.89,465.91 ; C6.2@1338.89,1423.83 v1(1338.89,1462.28) ; v1(1732.59,427.46) C68.2@1732.59,465.91 ; C5.2@1732.59,1423.83 v1(1732.59,1462.28) ; v1(1925,920) 1925.65,920.65 1925.65,943.59 R12.1@1926.3,944.24 ; v1(1965,920) 1965.65,920.65 1965.65,943.59 R11.1@1966.3,944.24 ; C55.2@2009.15,708.65 v1(2047.6,708.65) 2139.65,708.65 2156.19,692.11 2452.41,692.11 2465.3,705 2542.99,705 ; C11.2@2009.15,1181.09 v1(2047.6,1181.09) ; v1@2076.98,809.39 v1(2077.3,809.07) ; v1@2077.3,809.39 2160.69,809.39 2201.3,850 v1(2453.3,850) v1(2606.3,850) v1(2714.3,850) 2746.3,818 2746.3,782 2733.8,769.5 v1(2720.8,769.5) C2.2@2689.61,769.5 2689.61,727.31 2667.3,705 2542.99,705 ; v1(2106.97,560.04) C65.2@2106.97,585.04 ; v1(2169.96,560.04) C64.2@2169.96,585.04 ; C8.2@2264.45,1303.54 v1(2264.45,1328.54) ; v1(2358.94,560.04) C63.2@2358.94,585.04 ; C1.2@2411.61,769.5 v1(2442.8,769.5) ; C7.2@2453.43,1303.54 v1(2453.43,1328.54) ; v1(2516.42,560.04) C62.2@2516.42,585.04 ; Y2.2@2542.99,746.5 2542.99,705 ; v1(2925.87,560.04) C61.2@2925.87,585.04
  other v1: 2583.3,1438 2729.3,1438 2869.3,1438
J1_L7N_B2: J4.7 P1.J1 | length 1494.1
  TOP w5: J4.7@385.73,194.88 385.73,156.38 ccw(c390.73,156.38) 390.73,151.38 402.78,151.38 ccw(c402.78,176.9) 428.3,176.9 428.3,190.5 cw(c478.76,190.49) 443.11,226.2 594.85,377.95 cw(c684.31,288.48) 684.32,415 944.6,415 ccw(c944.6,444.7) 965.6,423.7 977.27,435.37 ccw(c950.64,462) 988.3,462 988.3,825 cw(c1027.86,825.01) 999.88,852.98 1024.65,877.75 cw(c1119.42,782.97) 1119.43,917 1180.71,917 ccw(c1180.71,924.5) 1188.21,924.5 1188.21,936.5 cw(c1195.71,936.5) 1203.21,936.5 1203.21,924.5 ccw(c1210.71,924.5) 1210.71,917 1220.71,917 ccw(c1220.71,944.93) P1.J1@1240.46,925.18
J2_L7P_B2: J4.8 P1.J2 | length 1495.8
  TOP w5: J4.8@385.73,94.88 385.73,133.38 cw(c390.73,133.38) 390.73,138.38 402.78,138.38 ccw(c402.78,176.9) 441.3,176.9 441.3,190.49 cw(c478.76,190.48) 452.3,217 604.05,368.75 cw(c684.32,288.48) 684.32,402 944.61,402 ccw(c944.6,444.7) 974.79,414.5 987.05,426.76 ccw(c950.63,461.99) 1001.3,462 1001.3,825 cw(c1027.86,825) 1009.08,843.78 1033.85,868.55 cw(c1119.43,782.98) 1119.43,904 1228.7,904 ccw(c1228.7,976.31) P1.J2@1279.83,925.18
K1_L10N_B2: J4.9 P1.K1 | length 1404.4
  TOP w5: J4.9@485.73,194.88 485.73,156.38 ccw(c490.73,156.38) 490.73,151.38 517.3,151.38 ccw(c517.3,163.38) 529.3,163.38 529.3,241 cw(c570.32,241.01) 541.31,270.01 541.8,270.49 637.8,366.49 cw(c670.42,333.87) 670.42,380 958.74,380 ccw(c958.74,404.55) 976.1,387.19 1030.1,441.19 ccw(c1007.89,463.4) 1039.3,463.4 1039.3,806.39 cw(c1064.91,806.39) 1046.8,824.5 1085.8,863.5 cw(c1115.98,833.32) 1115.98,876 1131.02,876 ccw(c1131.02,883.5) 1138.52,883.5 1138.52,885.5 cw(c1146.02,885.5) 1153.52,885.5 1153.52,883.5 ccw(c1161.02,883.5) 1168.52,883.5 1168.52,885.5 cw(c1176.02,885.5) 1183.52,885.5 1183.52,883.5 ccw(c1191.02,883.5) 1191.02,876 1220.3,876 ccw(c1220.3,900.99) 1237.97,883.32 P1.K1@1240.46,885.81
K2_L10P_VREF_B2: J4.10 P1.K2 | length 1404.4
  TOP w5: J4.10@485.73,94.88 485.73,133.38 cw(c490.73,133.38) 490.73,138.38 517.3,138.38 ccw(c517.3,163.38) 542.3,163.38 542.3,241 cw(c570.3,241) 550.5,260.8 646,356.3 cw(c671.83,330.47) 671.83,367 961.57,367 ccw(c961.57,397.73) 983.3,376 1041.8,434.5 ccw(c1016.45,459.85) 1052.3,459.85 1052.3,800.03 cw(c1080.26,800.03) 1060.49,819.8 1093.99,853.3 cw(c1117.41,829.88) 1117.41,863 1224.76,863 ccw(c1224.76,940.88) P1.K2@1279.83,885.81
L1_L11N_B2: J4.11 P1.L1 | length 1361.6
  TOP w5: J4.11@585.73,194.88 585.73,156.38 ccw(c590.73,156.38) 590.73,151.38 622.3,151.38 ccw(c622.3,158.38) 629.3,158.38 629.3,226.29 ccw(c621.8,226.29) 621.8,233.79 608.8,233.79 cw(c608.8,241.29) 608.8,248.79 621.8,248.79 ccw(c621.8,256.29) 629.3,256.29 629.3,298.38 cw(c654.91,298.38) 636.8,316.49 658.8,338.49 cw(c679.34,317.95) 679.34,347 971.03,347 ccw(c971.03,373.26) 989.6,354.69 1068.1,433.19 ccw(c1045.89,455.4) 1077.3,455.4 1077.3,715.1 cw(c1101.2,715.1) 1084.3,732 1097.83,745.53 ccw(c1092.52,750.83) 1097.83,756.13 1078.12,775.84 cw(c1092.62,790.33) 1078.13,804.83 ; 1078.15,804.85 cw(c1092.65,790.36) 1107.14,804.86 1126.85,785.15 ccw(c1132.15,790.46) 1137.45,785.15 1183.8,831.5 cw(c1201.91,813.39) 1201.91,839 1222.5,839 ccw(c1222.5,864.4) P1.L1@1240.46,846.44
L2_L11P_B2: J4.12 P1.L2 | length 1360.6
  TOP w5: J4.12@585.73,94.88 585.73,133.38 cw(c590.73,133.38) 590.73,138.38 622.3,138.38 ccw(c622.3,158.38) 642.3,158.38 642.3,293.42 cw(c666.88,293.42) 649.5,310.8 665.5,326.8 cw(c682.88,309.42) 682.88,334 973.86,334 ccw(c973.86,366.44) 996.8,343.5 1079.8,426.5 ccw(c1054.45,451.85) 1090.3,451.85 1090.3,713.68 cw(c1104.61,713.68) 1094.49,723.8 1107.03,736.34 ccw(c1092.52,750.84) 1107.03,765.33 1087.32,785.03 cw(c1092.62,790.33) 1087.32,795.63 ; 1087.35,795.66 cw(c1092.65,790.36) 1097.94,795.66 1117.65,775.95 ccw(c1132.15,790.46) 1146.64,775.95 1190.49,819.8 cw(c1205.46,804.83) 1205.46,826 1230.48,826 ccw(c1230.48,895.79) P1.L2@1279.83,846.44
M1_CLK_1N_B2: J4.13 P1.M1 | length 1327.1
  TOP w5: J4.13@685.73,194.88 685.73,156.38 ccw(c690.73,156.38) 690.73,151.38 718.3,151.38 ccw(c718.3,165.38) 732.3,165.38 732.3,229 ccw(c727.3,229) 727.3,234 687.3,234 cw(c687.3,252) 669.3,252 669.3,297 cw(c687.3,297) 687.3,315 698.69,315 cw(c698.69,294.5) 719.19,294.5 719.19,280.5 ccw(c726.69,280.5) 734.19,280.5 734.19,294.5 cw(c754.69,294.5) 754.69,315 985.3,315 ccw(c985.3,343) 1005.1,323.2 1107.1,425.2 ccw(c1084.89,447.41) 1116.3,447.41 1116.3,467.85 ccw(c1110.3,467.85) 1110.3,473.85 cw(c1110.3,479.85) 1104.3,479.85 1104.3,482.85 cw(c1110.3,482.85) 1110.3,488.85 ccw(c1110.3,494.85) 1116.3,494.85 1116.3,497.85 ccw(c1110.3,497.85) 1110.3,503.85 cw(c1110.3,509.85) 1104.3,509.85 1104.3,512.85 cw(c1110.3,512.85) 1110.3,518.85 ccw(c1110.3,524.85) 1116.3,524.85 1116.3,647.1 ccw(c1109.8,647.1) 1109.8,653.6 cw(c1109.8,660.1) 1103.3,660.1 1103.3,662.1 cw(c1109.8,662.1) 1109.8,668.6 ccw(c1109.8,675.1) 1116.3,675.1 1116.3,706.08 cw(c1141.22,706.08) 1123.6,723.7 1187.69,787.79 cw(c1211.55,763.94) 1190.31,790.15 cw(c1212.48,762.84) 1212.46,798.01 1221.3,798 ccw(c1221.31,822.36) 1238.53,805.13 P1.M1@1240.46,807.07
M2_CLK_1P_B2: J4.14 P1.M2 | length 1327.7
  TOP w5: J4.14@685.73,94.88 685.73,133.38 cw(c690.73,133.38) 690.73,138.38 718.3,138.38 ccw(c718.3,165.38) 745.3,165.38 745.3,229 ccw(c727.3,229) 727.3,247 687.3,247 cw(c687.3,252) 682.3,252 682.3,297 cw(c687.3,297) 687.3,302 698.69,302 cw(c698.69,294.5) 706.19,294.5 706.19,280.5 ccw(c726.69,280.5) 747.19,280.5 747.19,294.5 cw(c754.69,294.5) 754.69,302 986.03,302 ccw(c986.03,341.26) 1013.79,313.5 1120.29,420 ccw(c1098.54,441.75) 1129.3,441.75 1129.3,701.83 cw(c1151.46,701.83) 1135.79,717.5 1196.79,778.5 cw(c1212.48,762.81) 1212.48,785 1226.55,785 ccw(c1226.55,860.35) P1.M2@1279.83,807.07
M6_IO_B3: J4.36 P1.M6 | length 1435.6
  TOP w5.78: v1(1417.63,787.39) P1.M6@1437.31,807.07
  BOTTOM w5.78: v1(1417.63,787.39) 1430.16,774.86 cw(c1415.33,760.04) 1436.3,760.04 1436.3,677.36 ccw(c1451.66,677.36) 1440.8,666.5 1452.3,655 cw(c1432.99,635.69) 1460.3,635.69 1460.3,437.31 cw(c1432.99,437.31) 1452.3,418 1435.8,401.5 ccw(c1453.91,383.39) 1428.3,383.39 1428.3,326.88 ccw(c1436.97,326.88) 1436.97,318.21 1458.63,318.21 cw(c1458.63,309.54) 1458.63,300.87 1417.97,300.87 ccw(c1417.97,292.2) 1417.97,283.53 1458.63,283.53 cw(c1458.63,274.86) 1458.63,266.19 1416.97,266.19 ccw(c1416.97,258.52) 1409.3,258.52 1409.3,243.3 ccw(c1417.6,243.3) 1417.6,235 1728.3,235 cw(c1728.3,227) 1736.3,227 1736.3,158.84 ccw(c1742.08,158.84) 1742.08,153.06 1794.12,153.06 cw(c1794.12,144.39) 1794.12,135.72 1732.08,135.72 ccw(c1732.08,129.94) 1726.3,129.94 1726.3,105 ccw(c1736.42,105) 1736.42,94.88 J4.36@1785.73,94.88
M7_IO_B3: J4.35 P1.M7 | length 1455.8
  TOP w5.78: v1(1457,787.39) P1.M7@1476.68,807.07
  BOTTOM w5.78: v1(1457,787.39) 1470.84,773.55 cw(c1455.24,757.95) 1477.3,757.95 1477.3,676.95 ccw(c1489.25,676.95) 1480.8,668.5 1483.8,665.5 cw(c1477.76,659.46) 1486.3,659.46 1486.3,293.78 ccw(c1495.08,293.78) 1495.08,285 1511.3,285 cw(c1511.3,276.33) 1519.97,276.33 1519.97,262.67 ccw(c1528.64,262.67) 1537.31,262.67 1537.31,284.33 cw(c1545.98,284.33) 1554.65,284.33 1554.65,262.67 ccw(c1563.32,262.67) 1571.99,262.67 1571.99,284.33 cw(c1580.66,284.33) 1589.33,284.33 1589.33,262.67 ccw(c1598,262.67) 1606.67,262.67 1606.67,284.33 cw(c1615.34,284.33) 1624.01,284.33 1624.01,262.67 ccw(c1632.68,262.67) 1641.35,262.67 1641.35,284.33 cw(c1650.02,284.33) 1658.69,284.33 1658.69,262.67 ccw(c1667.36,262.67) 1676.03,262.67 1676.03,284.33 cw(c1684.7,284.33) 1693.37,284.33 1693.37,262.67 ccw(c1702.04,262.67) 1710.71,262.67 1710.71,284.33 cw(c1719.38,284.33) 1728.05,284.33 1728.05,262.67 ccw(c1736.72,262.67) 1745.39,262.67 1745.39,284.33 cw(c1754.06,284.33) 1762.73,284.33 1762.73,261.64 ccw(c1771.4,261.64) 1780.07,261.64 1780.07,284.33 cw(c1788.74,284.33) 1788.74,293 1796.78,293 cw(c1796.78,284.48) 1805.3,284.48 1805.3,256.06 cw(c1788.23,256.06) 1800.3,243.99 1791.3,234.99 ccw(c1804.75,221.54) 1785.73,221.54 J4.35@1785.73,194.88
M8_IO_B3: J4.40 P1.M8 | length 1419.1
  TOP w5.78: v1(1496.37,787.39) P1.M8@1516.05,807.07
  BOTTOM w5.78: v1(1496.37,787.39) 1536.03,747.73 1537.13,746.64 cw(c1500.49,710.01) 1552.3,710 1552.3,498.61 ccw(c1577.91,498.61) 1559.8,480.5 1618.74,421.56 ccw(c1624.87,427.69) 1631,421.56 1634.24,424.8 cw(c1640.38,418.67) 1646.51,412.53 1643.22,409.24 ccw(c1649.36,403.11) 1655.49,396.97 1659.31,400.79 cw(c1665.45,394.65) 1671.59,388.51 1667.81,384.75 ccw(c1673.94,378.62) 1667.81,372.49 1674.8,365.5 ccw(c1692.91,383.61) 1692.91,358 1933.3,358 cw(c1933.3,348) 1943.3,348 1943.3,331.7 cw(c1934.63,331.7) 1934.63,323.03 1912.97,323.03 ccw(c1912.97,314.36) 1912.97,305.69 1960.63,305.69 cw(c1960.63,297.02) 1960.63,288.35 1912.97,288.35 ccw(c1912.97,279.68) 1912.97,271.01 1960.63,271.01 cw(c1960.63,262.34) 1960.63,253.67 1912.97,253.67 ccw(c1912.97,245) 1912.97,236.33 1934.63,236.33 cw(c1934.63,225.66) 1945.3,225.66 1945.3,148.96 ccw(c1978.25,148.96) 1954.95,125.66 J4.40@1985.73,94.88
M10_IO_B4: J4.43 P1.M10 | length 1446.2
  TOP w5.78: P1.M10@1594.8,807.07 v1(1614.48,787.39)
  BOTTOM w5.78: v1(1614.48,787.39) 1620.46,781.41 cw(c1587.05,748) 1634.3,748 1634.3,591 ccw(c1648.3,591) 1648.3,577 1765.99,577 cw(c1765.99,549.69) 1785.3,569 1827.01,527.29 cw(c1820.88,521.16) 1827.01,515.03 1785.27,473.29 ccw(c1791.41,467.15) 1797.55,461.01 ; 1797.54,461.02 1839.28,502.76 cw(c1845.42,496.63) 1851.55,490.49 1820.81,459.76 ccw(c1826.95,453.63) 1833.08,447.49 1863.82,478.22 cw(c1869.96,472.08) 1876.1,465.94 ; 1876.09,465.95 1855.85,445.71 ccw(c1861.98,439.57) 1868.12,433.44 1888.36,453.68 cw(c1894.49,447.55) 1900.62,453.68 1910.8,443.5 ccw(c1933.74,466.44) 1933.74,434 2098.3,434 cw(c2098.3,400.2) 2122.2,424.1 2181.79,364.51 cw(c2172.28,355) 2185.73,355 2185.73,348.55 cw(c2177.06,348.55) 2177.06,339.88 2172.97,339.88 ccw(c2172.97,331.21) 2172.97,322.54 2177.06,322.54 cw(c2177.06,313.87) 2177.06,305.2 2172.97,305.2 ccw(c2172.97,296.53) 2172.97,287.86 2177.06,287.86 cw(c2177.06,279.19) 2177.06,270.52 2172.97,270.52 ccw(c2172.97,261.85) 2172.97,253.18 2177.06,253.18 cw(c2177.06,244.51) 2185.73,244.51 J4.43@2185.73,194.88
MSEL0: P1.H13 R12.2 R15.1 | length 236
  TOP w5.78: P1.H13@1712.91,964.56 v1(1732.59,984.24)
  BOTTOM w5.78: v1(1732.59,984.24) 1746.56,970.27 ccw(c1761.7,985.41) 1761.7,964 1823.94,964 ccw(c1823.94,979.36) 1834.8,968.5 1845.3,979 cw(c1857.95,966.35) 1857.95,984.24 R15.1@1886.3,984.24 R12.2@1926.3,984.24
MSEL1: P1.H12 R11.2 | length 324.9
  TOP w5.78: P1.H12@1673.54,964.56 v1(1693.22,984.24)
  BOTTOM w5.78: v1(1693.22,984.24) 1706.14,997.16 cw(c1722.65,980.65) 1722.65,1004 1959.48,1004 cw(c1959.48,997.18) 1966.3,997.18 R11.2@1966.3,984.24
MSEL2: P1.G12 R14.1 | length 385.9
  TOP w5.78: P1.G12@1673.54,1003.93 v1(1693.22,1023.61)
  BOTTOM w5.78: v1(1693.22,1023.61) 1706.45,1036.84 cw(c1723.74,1019.55) 1723.74,1044 1782.94,1044 cw(c1782.94,1028.65) 1793.8,1039.5 1808.83,1024.47 ccw(c1822.03,1037.66) 1822.03,1019 1992.12,1019 cw(c1992.12,1004.82) 2006.3,1004.82 R14.1@2006.3,984.24
N1_L13N_B2: J4.3 P1.N1 | length 1489.4
  TOP w5.78: v1(1220.78,748.02) P1.N1@1240.46,767.7
  BOTTOM w5: J4.3@185.73,194.88 185.73,156.38 ccw(c190.73,156.38) 190.73,151.38 222.3,151.38 ccw(c222.3,158.38) 229.3,158.38 229.3,211.76 cw(c325.54,211.76) 325.54,308 737.18,308 ccw(c737.18,631.79) 966.14,402.84 1099.75,536.45 ccw(c1094.44,541.75) 1099.75,547.05 1098.35,548.45 cw(c1103.66,553.75) 1108.96,559.06 1110.36,557.66 ccw(c1115.66,562.97) 1120.97,568.27 1119.57,569.67 cw(c1124.88,574.97) 1130.18,580.28 1131.58,578.88 ccw(c1136.88,584.19) 1142.18,578.88 1165.31,602.01 ccw(c1141.28,626.09) 1175.3,626.09 1175.3,716.01 cw(c1198.29,716.01) 1198.29,739 1205.3,739 ccw(c1205.3,754.6) 1216.33,743.57 v1(1220.78,748.02)
N2_L13P_B2: J4.4 P1.N2 | length 1491.2
  TOP w5.78: v1(1260.15,748.02) P1.N2@1279.83,767.7
  BOTTOM w5: J4.4@185.73,94.88 185.73,133.38 cw(c190.73,133.38) 190.73,138.38 222.3,138.38 ccw(c222.3,158.38) 242.3,158.38 242.3,211.76 cw(c325.54,211.76) 325.54,295 737.18,295 ccw(c737.19,631.8) 975.34,393.64 1174.5,592.81 ccw(c1141.27,626.09) 1188.3,626.09 1188.3,716.01 cw(c1198.29,716.01) 1198.29,726 1223.3,726 ccw(c1223.29,761.8) 1248.61,736.49 v1(1260.15,748.02)
N3_B1P_B3: J4.22 P1.N3 | length 1404.5
  TOP w5.78: v1(1299.52,748.02) P1.N3@1319.2,767.7
  BOTTOM w5: J4.22@1085.73,94.88 1085.73,133.38 cw(c1090.73,133.38) 1090.73,138.38 1129.3,138.38 cw(c1129.3,133.38) 1134.3,133.38 1134.3,47 cw(c1129.3,47) 1129.3,42 1045.3,42 cw(c1045.3,47) 1040.3,47 1040.3,134.84 cw(c1047.8,134.84) 1047.8,142.34 ccw(c1047.8,149.84) 1047.8,157.34 cw(c1047.8,164.84) 1040.3,164.84 1040.3,239.17 cw(c1047.8,239.17) 1047.8,246.67 1082.91,246.67 ccw(c1082.91,267.17) 1082.91,287.67 1047.8,287.67 cw(c1047.8,295.17) 1040.3,295.17 1040.3,324.44 cw(c1064.85,324.44) 1047.49,341.8 1056.39,350.7 cw(c1061.69,345.39) 1066.99,350.7 1090.48,327.2 ccw(c1104.98,341.69) 1119.48,327.2 ; 1119.51,327.23 ccw(c1105.01,341.73) 1119.51,356.22 1096.01,379.72 cw(c1101.32,385.02) 1096.01,390.32 1163.65,457.96 cw(c1168.94,452.65) 1174.25,457.95 1184.74,447.46 ccw(c1199.24,461.95) 1213.74,447.46 ; 1213.77,447.49 ccw(c1199.27,461.99) 1213.77,476.48 1203.27,486.98 cw(c1208.58,492.28) 1203.27,497.58 1306.99,601.3 ccw(c1279.69,628.6) 1318.3,628.61 1318.3,702.68 ccw(c1254.18,702.68) v1(1299.52,748.02)